# EAGLE board CT_schematic (EAGLE 7.6.0)

Size 100 x 80 mm. Coordinates in mm from the lower left corner, seen from the top.
Outline: 0,0 100,0 100,80 0,80 0,0
Copper layers (1*16): Top 0.035mm / dielectric 1.5mm / Bottom 0.035mm
Design rules "default": minimum track width 10mil, minimum drill 24mil, track to track 8mil, track to pad 8mil, pad to pad 8mil, via to via 8mil, smd to smd 8mil, copper to edge 40mil, drill to drill 8mil, minimum pad ring 10mil, minimum via ring 8mil, stop-mask expansion 4mil, vias tented up to drill 0mil, thermal gap 10mil

## Footprints (pad centres in the part's own frame; a part is rotated, then mirrored left to right if it is on the bottom)
C0603 = smd 0.8 x 0.8: 1 -0.762,0; 2 0.762,0
C0402 = smd 0.5 x 0.5: 1 -0.508,0; 2 0.508,0
C1210 = smd 1.2 x 2.5: 1 -1.524,0; 2 1.524,0
C0805 = smd 1.2 x 1.3: 1 -1.016,0; 2 1.016,0
2220 = smd 1.85 x 5.5: 1 -2.55,0; 2 2.55,0
EXV-9H = smd 3.505 x 1.676: 1 -2.857,0; 2 2.857,0
L0603 = smd 0.8 x 0.8: 1 -0.762,0; 2 0.762,0
DR1040 = smd 1.6 x 3.2: 1 -4.458,0; 2 4.458,0
PJ-037B_PACKAGE = drill 3.7 square: 1 12,0 | drill 3.2 square: 2 6,0
R0603 = smd 0.8 x 0.8: 1 -0.762,0; 2 0.762,0
LQFP64 = smd 0.3 x 1.2: 1 -3.75,-5.75; 2 -3.25,-5.75; 3 -2.75,-5.75; 4 -2.25,-5.75; 5 -1.75,-5.75; 6 -1.25,-5.75; 7 -0.75,-5.75; 8 -0.25,-5.75; 9 0.25,-5.75; 10 0.75,-5.75; 11 1.25,-5.75; 12 1.75,-5.75; 13 2.25,-5.75; 14 2.75,-5.75; 15 3.25,-5.75; 16 3.75,-5.75; 33 3.75,5.75; 34 3.25,5.75; 35 2.75,5.75; 36 2.25,5.75; 37 1.75,5.75; 38 1.25,5.75; 39 0.75,5.75; 40 0.25,5.75; 41 -0.25,5.75; 42 -0.75,5.75; 43 -1.25,5.75; 44 -1.75,5.75; 45 -2.25,5.75; 46 -2.75,5.75; 47 -3.25,5.75; 48 -3.75,5.75 | smd 1.2 x 0.3: 17 5.75,-3.75; 18 5.75,-3.25; 19 5.75,-2.75; 20 5.75,-2.25; 21 5.75,-1.75; 22 5.75,-1.25; 23 5.75,-0.75; 24 5.75,-0.25; 25 5.75,0.25; 26 5.75,0.75; 27 5.75,1.25; 28 5.75,1.75; 29 5.75,2.25; 30 5.75,2.75; 31 5.75,3.25; 32 5.75,3.75; 49 -5.75,3.75; 50 -5.75,3.25; 51 -5.75,2.75; 52 -5.75,2.25; 53 -5.75,1.75; 54 -5.75,1.25; 55 -5.75,0.75; 56 -5.75,0.25; 57 -5.75,-0.25; 58 -5.75,-0.75; 59 -5.75,-1.25; 60 -5.75,-1.75; 61 -5.75,-2.25; 62 -5.75,-2.75; 63 -5.75,-3.25; 64 -5.75,-3.75
SOT-23-6 = smd 1.1 x 0.6: 1 -1.4,0.95; 2 -1.4,0; 3 -1.4,-0.95; 4 1.4,-0.95; 5 1.4,0; 6 1.4,0.95
SOIC-8 = smd 1.6 x 0.6: 1 -2.7,1.905 | smd 1.55 x 0.6: 2 -2.7,0.635; 3 -2.7,-0.635; 4 -2.7,-1.905; 5 2.7,-1.905; 6 2.7,-0.635; 7 2.7,0.635; 8 2.7,1.905
DFN8-S = smd 0.6 x 0.4: 1 -2.69,1.905; 2 -2.69,0.635; 3 -2.69,-0.635; 4 -2.69,-1.905; 5 2.69,-1.905; 6 2.69,-0.635; 7 2.69,0.635; 8 2.69,1.905
88-00153-02 = smd 1.6 x 1.6: 1 -0.2,0; 13 15,0; 20 15,9.2; 32 -0.2,9.2 | smd 0.8 x 1.6: 2 1.4,0; 3 2.6,0; 4 3.8,0; 5 5,0; 6 6.2,0; 7 7.4,0; 8 8.6,0; 9 9.8,0; 10 11,0; 11 12.2,0; 12 13.4,0; 21 13.4,9.2; 22 12.2,9.2; 23 11,9.2; 24 9.8,9.2; 25 8.6,9.2; 26 7.4,9.2; 27 6.2,9.2; 28 5,9.2; 29 3.8,9.2; 30 2.6,9.2; 31 1.4,9.2; 49 17.8,0 | smd 1.6 x 0.8: 14 15,1.6; 15 15,2.8; 16 15,4; 17 15,5.2; 18 15,6.4; 19 15,7.6; 33 -0.2,7.6; 34 -0.2,6.4; 35 -0.2,5.2; 36 -0.2,4; 37 -0.2,2.8; 38 -0.2,1.6 | smd 2 x 2: 39 3.5,3; 40 7.4,3; 41 11.3,3; 42 11.3,6.2; 43 7.4,6.2; 44 3.5,6.2 | smd 0.5 x 0.5: 45 1.55,3.85; 46 1.55,2.75; 47 1.55,1.65 | smd 0.8 x 0.8: 48 16.6,-0.4
USB-A-H = drill 0.914: 1 2.718,3.493; 2 2.718,1.003; 3 2.718,-1.003; 4 2.718,-3.493 | drill 2.311: 5 0,-6.566; 6 0,6.566
SOT143B = smd 1 x 0.7: 1 -0.75,-1 | smd 0.6 x 0.7: 2 0.95,-1; 3 0.95,1; 4 -0.95,1
ABS07-32.768KHZ-7-T = smd 1.1 x 2.4: 1 -2.5,0; 2 0,0
ABLS-25.000MHZ-B2F-T = smd 5.6 x 2.8: 1 -3.81,0; 2 5.69,0
WSON-8 = smd 0.3 x 0.6: 1 -0.75,0; 2 0.05,0; 3 0.85,0; 4 1.65,0; 5 1.65,3.8; 6 0.85,3.8; 7 0.05,3.8; 8 -0.75,3.8 | smd 3 x 2.6: PAD 0.45,1.9
QFN-16_EP = smd 0.805 x 0.3: 1 -1.452,0.75; 2 -1.452,0.25; 3 -1.452,-0.25; 4 -1.452,-0.75; 9 1.452,-0.75; 10 1.452,-0.25; 11 1.452,0.25; 12 1.452,0.75 | smd 0.3 x 0.805: 5 -0.75,-1.452; 6 -0.25,-1.452; 7 0.25,-1.452; 8 0.75,-1.452; 13 0.75,1.452; 14 0.25,1.452; 15 -0.25,1.452; 16 -0.75,1.452 | smd 1.55 x 1.55: 17 0,0
SON-6 = smd 0.55 x 0.3: 1 -0.355,0.5 | smd 0.52 x 0.3: 2 -0.37,0; 3 -0.37,-0.5; 4 0.37,-0.5; 5 0.37,0; 6 0.37,0.5
SW_4-1437565-2 = smd 1.4 x 2.1: 1 -2.23,4.55; 2 -2.23,-4.55; 3 2.23,4.55; 4 2.23,-4.55
LGM67K-G1J2-24-Z = smd 0.8 x 1.4: A -2,0; C 0,0
NC7SZ125M5X = smd 1.3 x 0.7: 1 -1.3,0.95; 2 -1.3,0; 3 -1.3,-0.95; 4 1.3,-0.95; 5 1.3,0.95

## Placement (x,y rotation side)
C1  1e-06  [C0603]  -26.67,68.58 0 top  (outside the outline)
C2  1e-07  [C0603]  -30.48,68.58 0 top  (outside the outline)
C3  1e-07  [C0603]  -34.29,68.58 0 top  (outside the outline)
C4  1e-07  [C0603]  -38.1,68.58 0 top  (outside the outline)
C5  1e-07  [C0603]  -41.91,68.58 0 top  (outside the outline)
C6  1e-07  [C0603]  -45.72,68.58 0 top  (outside the outline)
C7  4.7e-06  [C0603]  -19.05,68.58 0 top  (outside the outline)
C8  2.2e-06  [C0603]  -22.86,68.58 0 top  (outside the outline)
C9  1e-08  [C0603]  -49.53,68.58 0 top  (outside the outline)
C10  1e-06  [C0603]  -53.34,68.58 0 top  (outside the outline)
C11  1e-11  [C0402]  -45.72,73.66 0 top  (outside the outline)
C12  1e-11  [C0402]  -49.53,73.66 0 top  (outside the outline)
C13  1e-11  [C0402]  -53.34,73.66 0 top  (outside the outline)
C14  1e-11  [C0402]  -57.15,73.66 0 top  (outside the outline)
C15  1e-08  [C0402]  -60.96,73.66 0 top  (outside the outline)
C16  1e-08  [C0402]  -64.77,73.66 0 top  (outside the outline)
C17  1e-08  [C0402]  -68.58,73.66 0 top  (outside the outline)
C18  1e-07  [C0402]  -72.39,73.66 0 top  (outside the outline)
C19  1e-06  [C0603]  -57.15,68.58 0 top  (outside the outline)
C20  1e-07  [C0402]  -76.2,73.66 0 top  (outside the outline)
C21  1e-06  [C0603]  -60.96,68.58 0 top  (outside the outline)
C22  1e-08  [C0402]  -15.24,78.74 0 top  (outside the outline)
C23  1e-05  [C1210]  -29.21,52.07 0 top  (outside the outline)
C24  1e-05  [C0805]  -52.07,50.8 0 top  (outside the outline)
C25  1e-05  [C0805]  -57.15,50.8 0 top  (outside the outline)
C26  1e-06  [C0603]  -64.77,68.58 0 top  (outside the outline)
C27  1e-07  [C0402]  -19.05,78.74 0 top  (outside the outline)
C28  6.8e-05  [2220]  -49.53,35.56 0 top  (outside the outline)
C29  1e-07  [C0402]  -22.86,78.74 0 top  (outside the outline)
C30  0.0001  [EXV-9H]  -17.78,44.45 0 top  (outside the outline)
C31  0.0001  [EXV-9H]  -29.21,44.45 0 top  (outside the outline)
C32  1e-08  [C0402]  -26.67,78.74 0 top  (outside the outline)
C33  1e-08  [C0402]  -30.48,78.74 0 top  (outside the outline)
F1  240.0  [L0603]  -68.58,68.58 0 top  (outside the outline)
I1  7e-06  [DR1040]  -55.88,22.86 0 top  (outside the outline)
J1  PJ-037B  [PJ-037B_PACKAGE]  -73.66,7.62 0 top  (outside the outline)
R2  1000.0  [R0603]  -72.39,68.58 0 top  (outside the outline)
R4  4700.0  [R0603]  -76.2,68.58 0 top  (outside the outline)
R5  4700.0  [R0603]  -15.24,73.66 0 top  (outside the outline)
R6  2200.0  [R0603]  -19.05,73.66 0 top  (outside the outline)
R7  2200.0  [R0603]  -22.86,73.66 0 top  (outside the outline)
R8  47000.0  [R0603]  -25.4,58.42 0 top  (outside the outline)
R9  10000.0  [R0603]  -30.48,58.42 0 top  (outside the outline)
R10  1270.0  [R0603]  -26.67,73.66 0 top  (outside the outline)
R11  10000.0  [R0603]  -35.56,58.42 0 top  (outside the outline)
R12  10000.0  [R0603]  -40.64,58.42 0 top  (outside the outline)
R13  10000.0  [R0603]  -45.72,58.42 0 top  (outside the outline)
R14  10000.0  [R0603]  -50.8,58.42 0 top  (outside the outline)
R15  10000.0  [R0603]  -55.88,58.42 0 top  (outside the outline)
R16  10000.0  [R0603]  -60.96,58.42 0 top  (outside the outline)
R17  10000.0  [R0603]  -66.04,58.42 0 top  (outside the outline)
R18  10000.0  [R0603]  -71.12,58.42 0 top  (outside the outline)
R19  10000.0  [R0603]  -76.2,58.42 0 top  (outside the outline)
R20  10000.0  [R0603]  -15.24,63.5 0 top  (outside the outline)
R21  10000.0  [R0603]  -20.32,63.5 0 top  (outside the outline)
R22  10000.0  [R0603]  -25.4,63.5 0 top  (outside the outline)
R23  34000.0  [R0603]  -30.48,63.5 0 top  (outside the outline)
R24  34000.0  [R0603]  -35.56,63.5 0 top  (outside the outline)
R25  34000.0  [R0603]  -40.64,63.5 0 top  (outside the outline)
R26  34000.0  [R0603]  -45.72,63.5 0 top  (outside the outline)
R27  34000.0  [R0603]  -50.8,63.5 0 top  (outside the outline)
R28  34000.0  [R0603]  -55.88,63.5 0 top  (outside the outline)
R29  10000.0  [R0603]  -60.96,63.5 0 top  (outside the outline)
R30  100000.0  [R0603]  -62.23,50.8 0 top  (outside the outline)
R31  806.0  [R0603]  -30.48,73.66 0 top  (outside the outline)
R32  1000.0  [R0603]  -34.29,73.66 0 top  (outside the outline)
R33  20000.0  [R0603]  -66.04,63.5 0 top  (outside the outline)
R34  150000.0  [R0603]  -67.31,50.8 0 top  (outside the outline)
R35  300000.0  [R0603]  -72.39,50.8 0 top  (outside the outline)
R36  10000.0  [R0603]  -71.12,63.5 0 top  (outside the outline)
R37  10000.0  [R0603]  -76.2,63.5 0 top  (outside the outline)
R38  82000.0  [R0603]  -15.24,68.58 0 top  (outside the outline)
R39  300000.0  [R0603]  -15.24,58.42 0 top  (outside the outline)
R40  120000.0  [R0603]  -20.32,58.42 0 top  (outside the outline)
U1  STM32F446RCT7  [LQFP64]  -24.13,24.13 0 top  (outside the outline)
U2  MAX4995AAUT+T  [SOT-23-6]  -34.29,50.8 0 top  (outside the outline)
U3  AT25010B-SSHL-T  [SOIC-8]  -24.13,35.56 0 top  (outside the outline)
U4  AT25128B-SSHL-T  [SOIC-8]  -40.64,35.56 0 top  (outside the outline)
U5  24AA256-I/MF  [DFN8-S]  -71.12,22.86 0 top  (outside the outline)
U6  88-00153-02  [88-00153-02]  -57.15,2.54 0 top  (outside the outline)
U7  61400416021  [USB-A-H]  -19.05,8.89 0 top  (outside the outline)
U8  prtr5v0u2ax  [SOT143B]  -43.18,78.74 0 top  (outside the outline)
U9  ABS07-32.768KHZ-7-T  [ABS07-32.768KHZ-7-T]  -71.12,44.45 0 top  (outside the outline)
U10  ABLS-25.000MHZ-B2F-T  [ABLS-25.000MHZ-B2F-T]  -48.26,44.45 0 top  (outside the outline)
U11  LP3878SDX-ADJ/NOPB  [WSON-8]  -71.12,34.29 0 top  (outside the outline)
U12  LTC3601EUD#PBF  [QFN-16_EP]  -39.37,73.66 0 top  (outside the outline)
U13  TPS3895ADRYR  [SON-6]  -46.99,77.47 0 top  (outside the outline)
U14  4-1437565-2  [SW_4-1437565-2]  -45.72,24.13 0 top  (outside the outline)
U15  Q65110A2395  [LGM67K-G1J2-24-Z]  -17.78,52.07 0 top  (outside the outline)
U16  nc7sz125m5x  [NC7SZ125M5X]  -39.37,50.8 0 top  (outside the outline)
U17  nc7sz125m5x  [NC7SZ125M5X]  -45.72,50.8 0 top  (outside the outline)

## Library data of the parts
C1-C33 F1 I1 J1 R2 R4-R40 U1-U17 = circuit_tree

## Nets
CLK_CRYSTAL_U1_3: C11.1 U1.3 U9.1
CLK_CRYSTAL_U1_4: C12.1 U1.4 U9.2
CLK_CRYSTAL_U1_5: C13.1 U1.5 U10.1
CLK_CRYSTAL_U1_6: C14.1 U1.6 U10.2
GND: C1.2 C2.2 C3.2 C4.2 C5.2 C6.2 C7.2 C8.2 C9.2 C10.2 C11.2 C12.2 C13.2 C14.2 C15.2 C16.2 C17.2 C18.2 C19.2 C20.2 C21.2 C22.2 C23.2 C24.2 C25.2 C26.2 C28.1 C28.2 C29.2 C30.2 C31.2 C32.2 C33.2 J1.2 R2.2 R8.2 R9.2 R10.2 R12.2 R20.2 R21.2 R29.2 R32.2 R33.2 R35.2 R38.2 R40.2 U1.12 U1.18 U1.31 U1.47 U1.63 U2.2 U3.4 U4.4 U5.4 U5.7 U6.1 U6.9 U6.13 U6.14 U6.15 U6.16 U6.17 U6.18 U6.19 U6.20 U6.21 U6.22 U6.23 U6.24 U6.25 U6.26 U6.27 U6.31 U6.32 U6.39 U6.40 U6.41 U6.42 U6.43 U6.44 U6.49 U7.4 U7.5 U7.6 U8.1 U11.3 U11.PAD U12.1 U12.9 U12.17 U13.2 U15.C U16.1 U16.3 U17.1 U17.3
NET_U1_7: R5.1 U1.7 U17.4
NET_U1_13: C9.1 C10.1 F1.1 U1.13
NET_U1_30: C8.1 U1.30
NET_U1_43: R10.1 U1.43
NET_U1_58: R6.1 U1.58 U5.6
NET_U1_59: R7.1 U1.59 U5.5
NET_U1_60: R9.1 U1.60
NET_U1_61: U15.A
NET_U1_62: U14.3 U14.4
NET_U2_3: R8.1 U2.3
NET_U3_3: R13.1 U3.3
NET_U3_7: R15.1 U3.7
NET_U4_3: R16.1 U4.3
NET_U4_7: R18.1 U4.7
NET_U5_1: R19.1 U5.1
NET_U5_2: R20.1 U5.2
NET_U5_3: R21.1 U5.3
NET_U6_6: R29.1 U6.6
NET_U6_10: R4.1 U6.10 U16.4
NET_U6_11: R22.1 U6.11
NET_U11_1: C22.1 U11.1
NET_U11_6: R31.2 R32.1 U11.6
NET_U11_8: R30.1 U11.8
NET_U12_3: C27.2 I1.1 U12.3 U12.4
NET_U12_6: C27.1 U12.6
NET_U12_7: C26.1 U12.7 U12.12
NET_U12_10: R35.1 U12.10
NET_U12_11: R33.1 R34.1 U12.11
NET_U12_14: U12.14
NET_U12_ATNET_3: I1.2 R34.2
NET_U13_1: R37.1 R38.1 U13.1
NET_U13_3: R39.2 R40.1 U13.3
NET_U13_4: R36.1 U13.4 U16.2 U17.2
NET_U14_1: R2.1 U14.1 U14.2
PROC_GPIO_TO_U1_USB_FAULT: R11.1 U1.8 U2.6
PROC_GPIO_TO_U1_VBUS_EN: R12.1 U1.2 U2.4
PROC_SDIO_CK: R28.1 U1.28 U6.36
PROC_SDIO_CMD: R27.1 U1.54 U6.37
PROC_SDIO_D0: R23.1 U1.39 U6.35
PROC_SDIO_D1: R24.1 U1.26 U6.34
PROC_SDIO_D2: R25.1 U1.27 U6.2
PROC_SDIO_D3: R26.1 U1.52 U6.38
PROC_SPI1_MISO: U1.22 U4.2
PROC_SPI1_MOSI: U1.23 U4.5
PROC_SPI1_NSS: R17.1 U1.20 U4.1
PROC_SPI1_SCK: U1.21 U4.6
PROC_SPI2_MISO: U1.10 U3.2
PROC_SPI2_MOSI: U1.9 U3.5
PROC_SPI2_NSS: R14.1 U1.33 U3.1
PROC_SPI2_SCK: U1.29 U3.6
PROC_USB_OTG_FS_DM: U1.44 U7.2 U8.3
PROC_USB_OTG_FS_DP: U1.45 U7.3 U8.2
PROC_USB_OTG_FS_VBUS: U1.42 U2.1 U7.1 U8.4
VCC_S1_12V3: C23.1 C25.1 C30.1 C31.1 J1.1 R30.2 U11.4 U12.15 U12.16
VCC_TIER1_1V8: C1.1 C2.1 C3.1 C4.1 C5.1 C6.1 C7.1 C15.1 C16.1 C17.1 C20.1 C21.1 C24.1 C29.1 C32.1 C33.1 F1.2 R4.2 R5.2 R6.2 R7.2 R11.2 R13.2 R14.2 R15.2 R16.2 R17.2 R18.2 R19.2 R22.2 R23.2 R24.2 R25.2 R26.2 R27.2 R28.2 R31.1 R36.2 R37.2 R39.1 U1.1 U1.19 U1.32 U1.48 U1.64 U3.8 U4.8 U5.8 U6.33 U11.5 U13.6 U16.5 U17.5
VCC_TIER1_5V0: C18.1 C19.1 C28.2 I1.2 R34.2 U2.5 U6.12 U12.8

## Tracks (layer width: path | path; a pad name or v marks a point on that pad's centre or on a via)
CLK_CRYSTAL_U1_3  (2 unrouted)
CLK_CRYSTAL_U1_4  (2 unrouted)
CLK_CRYSTAL_U1_5  (2 unrouted)
CLK_CRYSTAL_U1_6  (2 unrouted)
GND  (97 unrouted)
NET_U1_7  (2 unrouted)
NET_U1_13  (3 unrouted)
NET_U1_30  (1 unrouted)
NET_U1_43  (1 unrouted)
NET_U1_58  (2 unrouted)
NET_U1_59  (2 unrouted)
NET_U1_60  (1 unrouted)
NET_U1_62  (1 unrouted)
NET_U2_3  (1 unrouted)
NET_U3_3  (1 unrouted)
NET_U3_7  (1 unrouted)
NET_U4_3  (1 unrouted)
NET_U4_7  (1 unrouted)
NET_U5_1  (1 unrouted)
NET_U5_2  (1 unrouted)
NET_U5_3  (1 unrouted)
NET_U6_6  (1 unrouted)
NET_U6_10  (2 unrouted)
NET_U6_11  (1 unrouted)
NET_U11_1  (1 unrouted)
NET_U11_6  (2 unrouted)
NET_U11_8  (1 unrouted)
NET_U12_3  (3 unrouted)
NET_U12_6  (1 unrouted)
NET_U12_7  (2 unrouted)
NET_U12_10  (1 unrouted)
NET_U12_11  (2 unrouted)
NET_U12_ATNET_3  (1 unrouted)
NET_U13_1  (2 unrouted)
NET_U13_3  (2 unrouted)
NET_U13_4  (3 unrouted)
NET_U14_1  (2 unrouted)
PROC_GPIO_TO_U1_USB_FAULT  (2 unrouted)
PROC_GPIO_TO_U1_VBUS_EN  (2 unrouted)
PROC_SDIO_CK  (2 unrouted)
PROC_SDIO_CMD  (2 unrouted)
PROC_SDIO_D0  (2 unrouted)
PROC_SDIO_D1  (2 unrouted)
PROC_SDIO_D2  (2 unrouted)
PROC_SDIO_D3  (2 unrouted)
PROC_SPI1_MISO  (1 unrouted)
PROC_SPI1_MOSI  (1 unrouted)
PROC_SPI1_NSS  (2 unrouted)
PROC_SPI1_SCK  (1 unrouted)
PROC_SPI2_MISO  (1 unrouted)
PROC_SPI2_MOSI  (1 unrouted)
PROC_SPI2_NSS  (2 unrouted)
PROC_SPI2_SCK  (1 unrouted)
PROC_USB_OTG_FS_DM  (2 unrouted)
PROC_USB_OTG_FS_DP  (2 unrouted)
PROC_USB_OTG_FS_VBUS  (3 unrouted)
VCC_S1_12V3  (8 unrouted)
VCC_TIER1_1V8  (52 unrouted)
VCC_TIER1_5V0  (7 unrouted)